# Altium PCB touch switch led controller.PcbDoc
Units mil, origin at the board's own origin, x right, y up, seen from the top; angles counter-clockwise.
Board outline 4448.82 x 2480.32 mil, 2 copper layers (Top Layer, Bottom Layer); 48 components, 37 nets, 171 pads, 38 vias.
Unrouted connection lines stored in the file: 51.
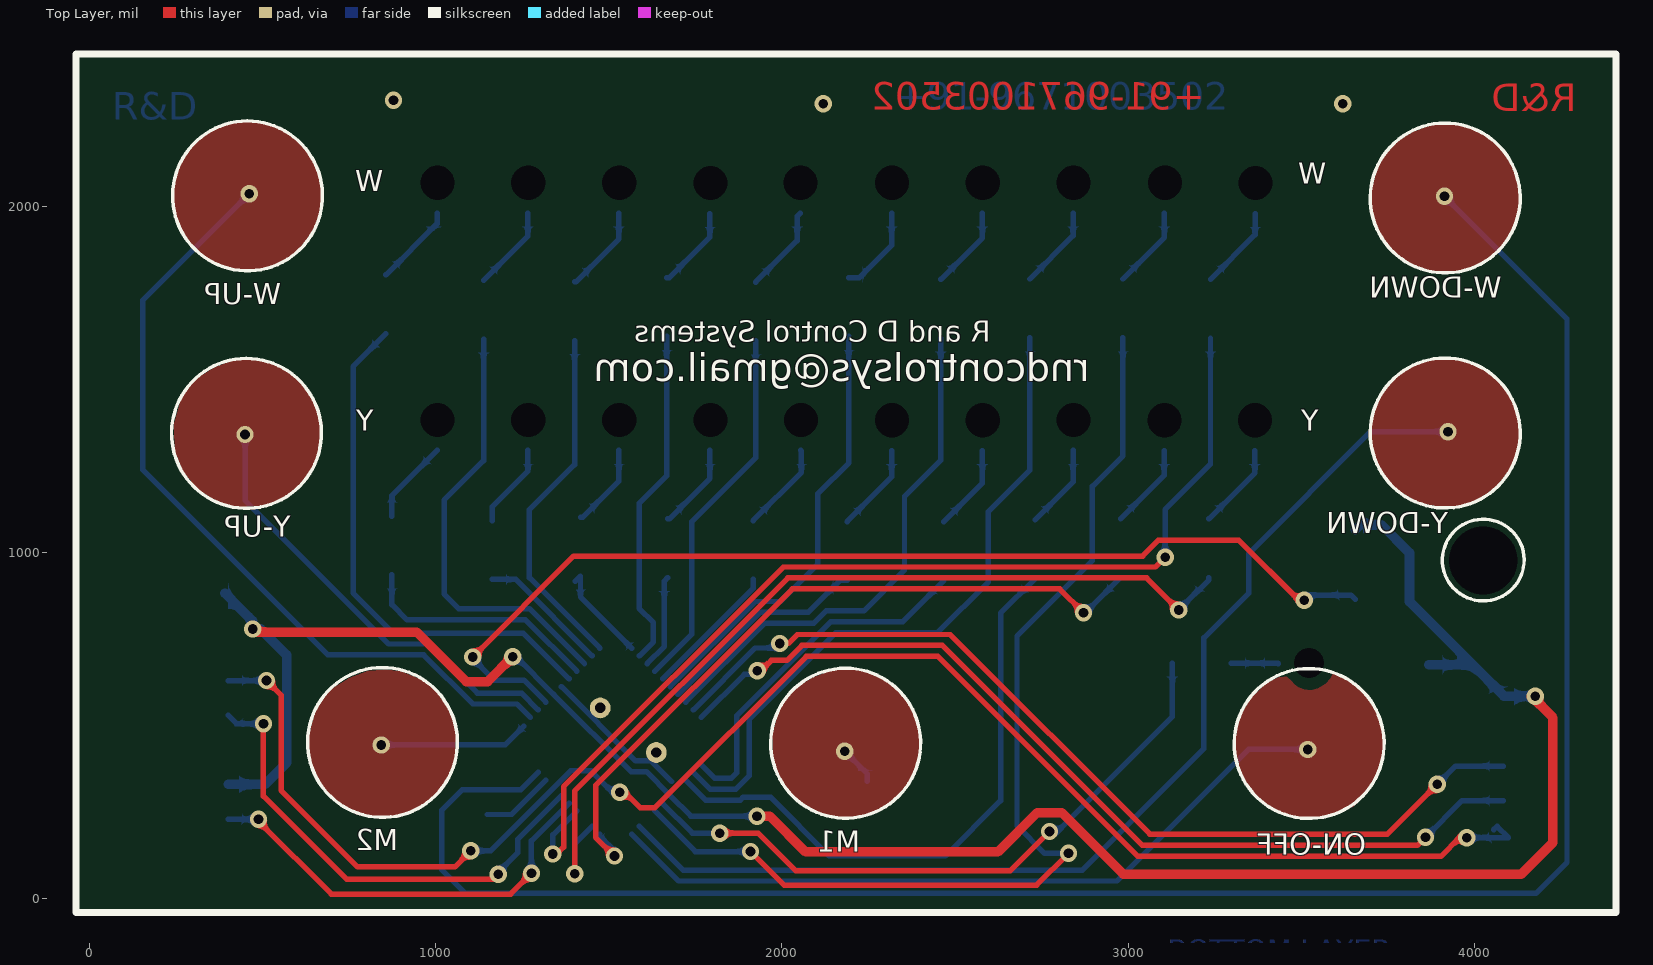
[diagram p0: Top Layer view]
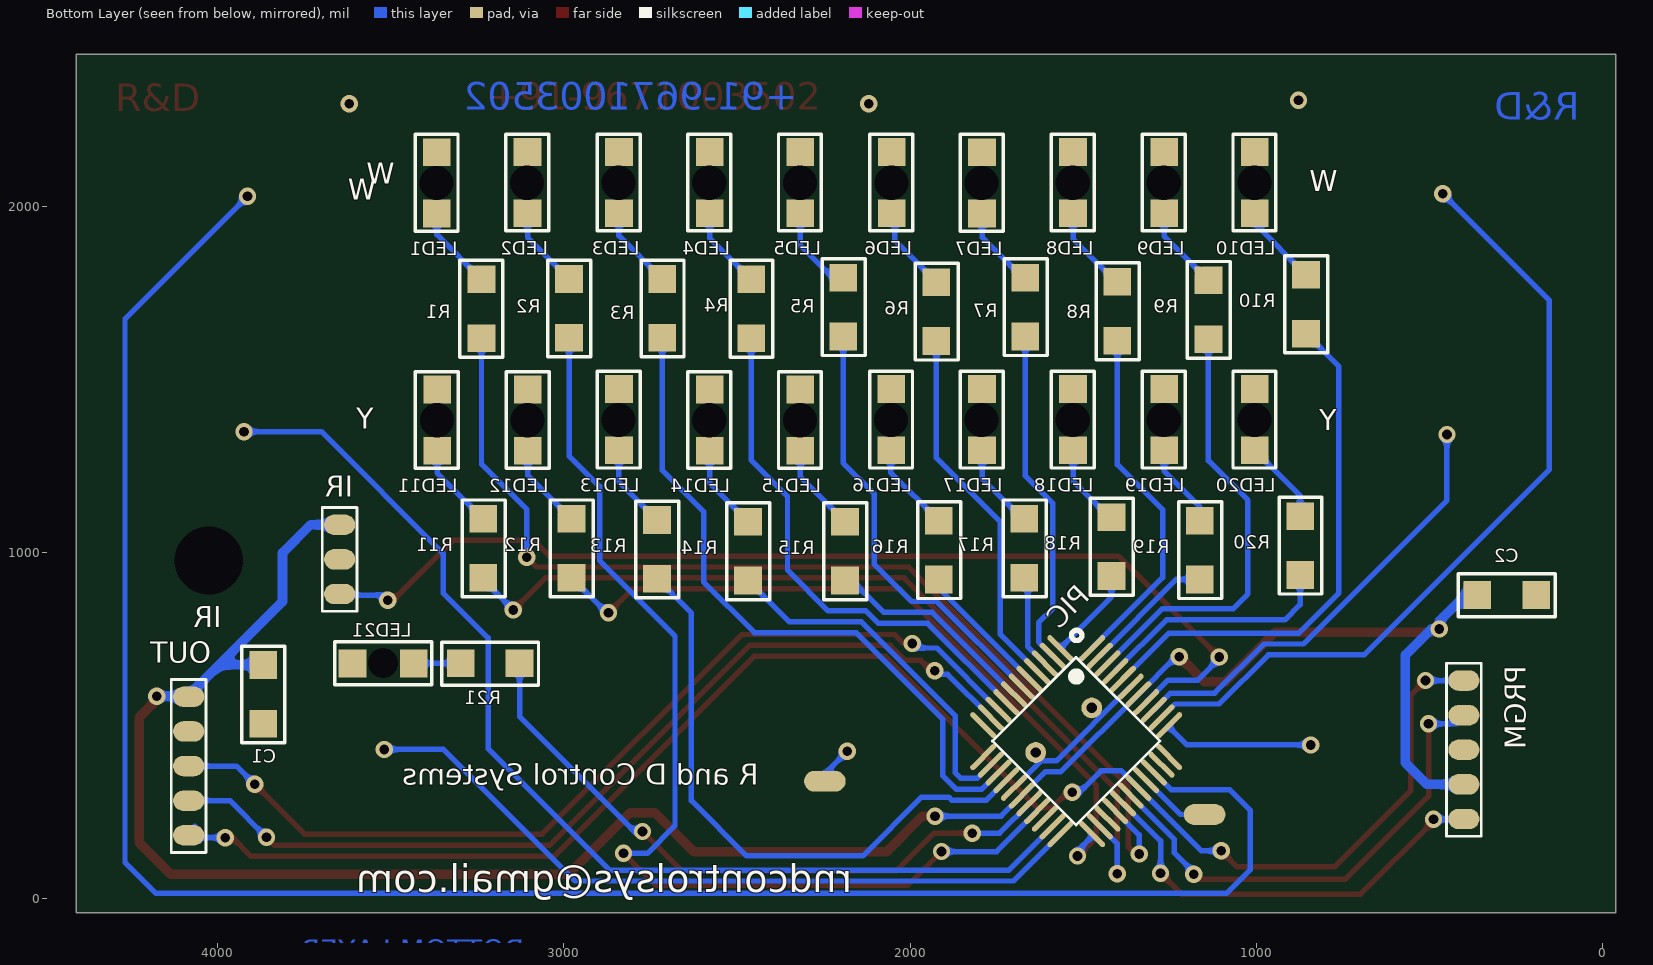
[diagram p1: Bottom Layer view, seen from below]

## Layer stack, top to bottom
Top Solder: solder mask 0.4, Solder Resist, Dk 3.5
Top Layer: signal copper 1.4
Dielectric 1: dielectric 12.6, FR-4, Dk 4.8
Bottom Layer: signal copper 1.4
Bottom Solder: solder mask 0.4, Solder Resist, Dk 3.5

## Board outline
-39.37,-39.37 -39.37,2440.94 4409.45,2440.94 4409.45,-39.37

## Design rules (kind name [scope] priority, off if disabled: settings)
AssemblyTestPointUsage [All] p1 off:
AssemblyTestpoint [All] p1 off: testpointundercomponent=TRUE minsize=40 maxsize=100 preferedsize=60 minholesize=0 maxholesize=40 preferedholesize=32 testpointgrid=1 usegrid=TRUE gridtolerance=0.01 allowsidetop=TRUE allowsidebottom=TRUE
Clearance [All] p1: gap=15.75 ignorepadtopadclearanceinfootprint=FALSE except(0: Arc-Hole Track-Hole SMDPad-THPad SMDPad-Hole THPad-Hole Via-Hole Fill-Hole Poly-Hole Region-Hole Text-Hole; 27.56: Arc-Poly Arc-Region Track-Poly Track-Region SMDPad-Poly SMDPad-Region THPad-Poly THPad-Region Via-Poly Via-Region Fill-Poly Fill-Region Poly-Poly Poly-Region Poly-Text Region-Region Region-Text)
DiffPairsRouting [All] p1 off: maxlimit=10 minlimit=10 mostfreqgap=10 toplayer_minwidth=15 toplayer_maxwidth=15 toplayer_prefwidth=15 bottomlayer_minwidth=15 bottomlayer_maxwidth=15 bottomlayer_prefwidth=15 maxuncoupledlength=500
FabricationTestPointUsage [All] p1 off: valid=0 allowmultiple=FALSE
FabricationTestpoint [All] p1 off: side=3 testpointundercomponent=TRUE minsize=40 maxsize=100 preferedsize=60 minholesize=0 maxholesize=40 preferedholesize=32 testpointgrid=1 allowsidetop=TRUE allowsidebottom=TRUE usegrid=TRUE gridtolerance=0.01
FanoutControl Fanout_BGA [IsBGA] p1 off: bgadir=Out bgaviamode=Centered fanoutstyle=Auto fanoutdirection=Alternating viagrid=1 // Fanout_BGA (Default Rule)
FanoutControl Fanout_LCC [IsLCC] p2 off: bgadir=Out bgaviamode=Centered fanoutstyle=Auto fanoutdirection=Alternating viagrid=1 // Fanout_LCC (Default Rule)
FanoutControl Fanout_SOIC [IsSOIC] p3 off: bgadir=Out bgaviamode=Centered fanoutstyle=Auto fanoutdirection=Alternating viagrid=1 // Fanout_SOIC (Default Rule)
FanoutControl Fanout_Small [(CompPinCount < 5)] p4 off: bgadir=Out bgaviamode=Centered fanoutstyle=Auto fanoutdirection=OutThenIn viagrid=1 // Fanout_Small (Default Rule)
FanoutControl Fanout_Default [All] p5 off: bgadir=Out bgaviamode=Centered fanoutstyle=Auto fanoutdirection=Alternating viagrid=1 // Fanout_Default (Default Rule)
Height [All] p1 off: minheight=0 maxheight=1000 prefheight=500
HoleToHoleClearance [All] p1 off: gap=10 allowstackedmicrovias=TRUE
LayerPairs [All] p1 off: enforce=TRUE
MinimumSolderMaskSliver [All] p1 off: minsoldermaskwidth=10
NetAntennae [All] p1 off: netantennaetolerance=0
PasteMaskExpansion [All] p1 off: expansion=0
PlaneClearance [All] p1 off: clearance=20
PlaneConnect [All] p1 off: planeconnectstyle=Relief reliefexpansion=20 reliefentries=4 reliefconductorwidth=10 reliefairgap=10
PolygonConnect [All] p1: connectstyle=Relief reliefconductorwidth=15.75 reliefentries=4 polygonreliefangle="90 Angle" airgapwidth=12
RoutingLayers [All] p1 off: top layer_v5=TRUE bottom layer_v5=TRUE
RoutingPriority [All] p1 off: routingpriority=0
RoutingTopology [All] p1 off: topology=Shortest
RoutingVias [All] p1: holewidth=28 width=50 viastyle="Through Hole" minholewidth=28 minwidth=50 maxholewidth=28 maxwidth=50
SilkToBoardRegionClearance [All] p1 off:
SilkToSilkClearance [All] p1 off: silktosilkclearance=10
SilkToSolderMaskClearance [IsPad] p1 off: minsilkscreentomaskgap=10 clearancetoexposedcopper=TRUE
SolderMaskExpansion [All] p1 off: expansion=4
UnpouredPolygon [All] p1 off:
Width [All] p1: maxlimit=59.06 minlimit=15.75 preferedwidth=27.56
5 further rules are at their usual default settings.

## Components (designator, comment, footprint, x,y, rotation, side; value= is the part's Value field where it differs from the comment)
C1 "RES1" 1206-RF1#1 3869,506 r90 bottom
C2 "RES1" 1206-RF1#1 361,878 r180 bottom
IR "Comment" HDR1X3 3648,881 r90 bottom
LED1 "WL-SMCW" 1206-RF1#2 3367,1984 r90 bottom locked
LED2 "WL-SMCW" 1206-RF1#2 3105,1985 r90 bottom locked
LED3 "WL-SMCW" 1206-RF1#2 2841,1985 r90 bottom locked
LED4 "WL-SMCW" 1206-RF1#2 2579,1985 r90 bottom locked
LED5 "WL-SMCW" 1206-RF1#2 2317,1985 r90 bottom locked
LED6 "WL-SMCW" 1206-RF1#2 2053,1985 r90 bottom locked
LED7 "WL-SMCW" 1206-RF1#2 1792,1984 r90 bottom locked
LED8 "WL-SMCW" 1206-RF1#2 1529,1985 r90 bottom locked
LED9 "WL-SMCW" 1206-RF1#2 1266,1985 r90 bottom locked
LED10 "WL-SMCW" 1206-RF1#2 1004,1985 r90 bottom locked
LED11 "WL-SMCW" 1206-RF1#2 3366,1299 r90 bottom locked
LED12 "WL-SMCW" 1206-RF1#2 3104,1299 r90 bottom locked
LED13 "WL-SMCW" 1206-RF1#2 2841,1300 r90 bottom locked
LED14 "WL-SMCW" 1206-RF1#2 2579,1299 r90 bottom locked
LED15 "WL-SMCW" 1206-RF1#2 2317,1299 r90 bottom locked
LED16 "WL-SMCW" 1206-RF1#2 2054,1300 r90 bottom locked
LED17 "WL-SMCW" 1206-RF1#2 1792,1300 r90 bottom locked
LED18 "WL-SMCW" 1206-RF1#2 1529,1300 r90 bottom locked
LED19 "WL-SMCW" 1206-RF1#2 1266,1300 r90 bottom locked
LED20 "WL-SMCW" 1206-RF1#2 1004,1300 r90 bottom locked
LED21 "WL-SMCW" 1206-RF1#2 3607,680 r180 bottom
OUT "Comment" HDR1X5 4084,584 r270 bottom
PIC "Comment" 44A_N 1520,456 r315 bottom
PRGM "Comment" HDR1X5 400,231 r90 bottom
R1 "RES1" 1206-RF1#1 3238,1790 r270 bottom
R2 "RES1" 1206-RF1#1 2985,1621 r90 bottom
R3 "RES1" 1206-RF1#1 2716,1621 r90 bottom
R4 "RES1" 1206-RF1#1 2459,1620 r90 bottom
R5 "RES1" 1206-RF1#1 2193,1625 r90 bottom
R6 "RES1" 1206-RF1#1 1924,1612 r90 bottom
R7 "RES1" 1206-RF1#1 1667,1625 r90 bottom
R8 "RES1" 1206-RF1#1 1401,1613 r90 bottom
R9 "RES1" 1206-RF1#1 1138,1617 r90 bottom
R10 "RES1" 1206-RF1#1 856,1633 r90 bottom
R11 "RES1" 1206-RF1#1 3233,928 r90 bottom
R12 "RES1" 1206-RF1#1 2978,928 r90 bottom
R13 "RES1" 1206-RF1#1 2731,925 r90 bottom
R14 "RES1" 1206-RF1#1 2468,920 r90 bottom
R15 "RES1" 1206-RF1#1 2188,920 r90 bottom
R16 "RES1" 1206-RF1#1 1917,923 r90 bottom
R17 "RES1" 1206-RF1#1 1670,928 r90 bottom
R18 "RES1" 1206-RF1#1 1418,933 r90 bottom
R19 "RES1" 1206-RF1#1 1163,923 r90 bottom
R20 "RES1" 1206-RF1#1 873,936 r90 bottom
R21 "RES1" 1206-RF1#1 3298,681 r180 bottom

## Footprints (in the part's own frame and the unit in brackets; to place one, negate y for a bottom-side part, rotate by r counter-clockwise, add the part's x,y. Pads: shape width x height; smd on the part's side, far side on the other; paste and mask are expansions set on the pad)
44A_N [mm] "Thin QFP, 44-Leads, Body 10x10mm, Pitch 0.8mm, IPC Medium Density"
  oval 2.54x0.4 smd: 1(-5.65,-4) 2(-5.65,-3.2) 3(-5.65,-2.4) 4(-5.65,-1.6) 5(-5.65,-0.8) 6(-5.65,0) 7(-5.65,0.8) 8(-5.65,1.6) 9(-5.65,2.4) 10(-5.65,3.2) 11(-5.65,4) 23(5.65,4) 24(5.65,3.2) 25(5.65,2.4) 26(5.65,1.6) 27(5.65,0.8) 28(5.65,0) 29(5.65,-0.8) 30(5.65,-1.6) 31(5.65,-2.4) 32(5.65,-3.2) 33(5.65,-4)
  oval 0.4x2.54 smd: 12(-4,5.65) 13(-3.2,5.65) 14(-2.4,5.65) 15(-1.6,5.65) 16(-0.8,5.65) 17(0,5.65) 18(0.8,5.65) 19(1.6,5.65) 20(2.4,5.65) 21(3.2,5.65) 22(4,5.65) 34(4,-5.65) 35(3.2,-5.65) 36(2.4,-5.65) 37(1.6,-5.65) 38(0.8,-5.65) 39(0,-5.65) 40(-0.8,-5.65) 41(-1.6,-5.65) 42(-2.4,-5.65) 43(-3.2,-5.65) 44(-4,-5.65)
  silkscreen extent -5.89,-5.84 4.35,4.35
1206-RF1#1 [mil]
  rect 80x80 smd: 1(0,0) 2(170,0)
  silkscreen extent -55,-63 225,61
1206-RF1#2 [mil]
  rect 80x80 smd: 1(-4,0) 2(173,0)
  silkscreen extent -55,-61 225,63
HDR1X3 [mil] "Connector; Header; 3 Position"
  oval 59.06x90 smd: 1(0,0) 2(100,0) 3(200,0)
  silkscreen extent -50,-50 250,50
HDR1X5 [mil] "Connector; Header; 5 Position"
  oval 59.06x90 smd: 1(0,0) 2(100,0) 3(200,0) 4(300,0) 5(400,0)
  silkscreen extent -50,-50 450,50

## Free pads (board coordinates)
  round 0 hole 98.43 unplated: 7(1005,1384) 7(1005,2069) 7(1267,1384) 7(1267,2069) 7(1530,1384) 7(1530,2069) 7(1793,1384) 7(1793,2068) 7(2054,2069) 7(2055,1384) 7(2318,1383) 7(2318,2069) 7(2580,1383) 7(2580,2069) 7(2842,1384) 7(2842,2069) 7(3105,1383) 7(3106,2069) 7(3367,1383) 7(3368,2068)
  round 0 hole 86.61 unplated: 7(3523,681)
  round 0 hole 196.85 unplated: 8(4026,978)
  round 60 hole 30: 9(1637,423) 10(1475,552)
  oval 120x60 smd far side: 11(1149,244) 11(2246,340)

## Via types
v1: diameter 50, hole 28, Top Layer to Bottom Layer, 38 vias

## Nets (pads, with @x,y where several pads share a name; then routed paths per layer and width w, separated by ;. In a path a pad name is that pad's centre, name@x,y a point inside that pad or via, vN(x,y) a via of type N, cw(c..) or ccw(c..) an arc to the next point about the centre after c; other vN are vias at no path point)
BUZZER: OUT.5 PIC.16 PRGM.5 | length 4745.2
  Top Layer w15.75: v1(511,631) 553,589 553,314 774,93 1055,93 v1(1101,139) ; v1(1531,308) 1546,308 1590,264 1633.3,264 2070.3,701 2450.46,701 3028.46,123 3904,123 3958,177 v1(3978,177)
  Bottom Layer w15.75: PRGM.5 v1(511,631) ; v1(1101,139) 1158.46,139 PIC.16 1389.46,370 1449,370 1511,308 v1(1531,308) ; v1(3978,177) 4099,177 4066,210 OUT.5@4056,200
CLK: 
DATA: PIC.17 PRGM.4 | length 1408
  Top Layer w15.75: v1(502,506) 502,297 742,57 1166,57 v1(1180,71)
  Bottom Layer w15.75: PRGM.4 425,506 v1(502,506) ; v1(1180,71) 1180,77 1237,134 1237,173 PIC.17
GND: C1.1 C2.2 IR.2 LED1.2 LED2.2 LED3.2 LED4.2 LED5.2 LED6.2 LED7.2 LED8.2 LED9.2 LED10.2 LED11.2 LED12.2 LED13.2 LED14.2 LED15.2 LED16.2 LED17.2 LED18.2 LED19.2 LED20.2 LED21.1 OUT.2 pad.9 pad.10 PIC.6 PIC.29 PRGM.3 | length 432.1
  Bottom Layer w15.75: PIC.6 1577,399 1621.54,399 1660.55,359.99 PIC.29@1681.27,339.27
  other v1: 2119,2297 3620,2297 878,2307
IR: IR.1 PIC.8 | length 3039.2
  Top Layer w15.75: v1(1107,699) 1398.49,990.49 3041.73,990.49 3086.86,1035.62 3320.38,1035.62 3493,863 v1(3509,863)
  Bottom Layer w15.75: v1(1107,699) 1107,693.92 1168.46,632.46 1254.46,632.46 PIC.8 ; v1(3509,863) 3524,878 3644,878 IR.1@3656,866
LED1W1: LED1.1 PIC.19 R1.1 R1.2 | length 3316.1
  Top Layer w15.75: v1(1338,130) 1350,130 1369.5,149.5 1369.5,324.59 2003.91,958.99 3078.99,958.99 v1(3107,987)
  Bottom Layer w15.75: v1(1338,130) 1338,184.92 PIC.19 ; v1@3113,987 v1(3107,987) 3107,1125 3238,1256 R1.2 ; R1.1 3367,1919 LED1.1
LED2W2: LED2.1 PIC.26 R2.1 R2.2 | length 3283.7
  Top Layer w15.75: v1(1909,137) 2006,40 2736,40 v1(2828,132)
  Bottom Layer w15.75: PIC.26 1749.92,137 v1(1909,137) ; v1@2828,128 v1(2828,132) 2759,132 2679,212 2679,759.59 2897,977.59 2897,1192 2985,1280 R2.1 ; R2.2 3105,1911 LED2.1
LED3W3: LED3.1 PIC.31 R3.1 R3.2 | length 2212.2
  Bottom Layer w15.75: PIC.31 1792.34,317.29 1866.9,317.29 1905.61,356 1905.61,519.61 2155.5,769.5 2449.5,769.5 2596,916 2596,1119 2716,1239 R3.1 ; R3.2 2841,1916 LED3.1
LED4W4: LED4.1 PIC.37 R4.1 R4.2 | length 1744.3
  Bottom Layer w15.75: PIC.37 1949.47,796.39 2091.84,796.39 2127.95,832.5 2236.5,832.5 2354,950 2354,1163 2459,1268 R4.1 ; R4.2 2579,1910 LED4.1
LED5W5: LED5.1 PIC.39 R5.1 R5.2 | length 1523
  Bottom Layer w15.75: PIC.39 1923.38,859.38 1995.38,859.38 2104,968 2104,1171 2193,1260 R5.1 ; R5.2 2224,1795 2317,1888 LED5.1
LED6W6: LED6.1 PIC.41 R6.1 R6.2 | length 1327.2
  Bottom Layer w15.75: PIC.41 1740,765.08 1740,1090 1924,1274 R6.1 ; R6.2 2044,1902 2044,1972 LED6.1
LED7W7: LED7.1 PIC.43 R7.1 R7.2 | length 1230.8
  Bottom Layer w15.75: PIC.43 1628.5,742.67 1628.5,798.5 1587.38,839.62 1587.38,1142.62 1667,1222.24 R7.1 ; R7.2 1675,1795 1792,1912 LED7.1
LED8W8: LED8.1 PIC.1 R8.1 R8.2 | length 1280
  Bottom Layer w15.75: R8.1 1401,1255 1270.56,1124.56 1270.56,928.15 PIC.1 ; R8.2 1405,1783 1529,1907 LED8.1
LED9W9: LED9.1 PIC.3 R9.1 R9.2 | length 1519
  Bottom Layer w15.75: R9.1 1138,1266 1024,1152 1024,881 1066,839 1270.63,839 PIC.3 ; R9.2 1266,1915 LED9.1
LED10W10: LED10.1 PIC.5 R10.1 R10.2 | length 1754.5
  Bottom Layer w15.75: R10.1 761,1538 761,884 877,768 1252.54,768 PIC.5 ; R10.2 1004,1951 LED10.1
LED11Y1: LED11.1 PIC.21 R11.1 R11.2 | length 2815.8
  Top Layer w15.75: v1(1401,73) 1401,311.54 2016.95,927.5 3053.5,927.5 v1(3146,835)
  Bottom Layer w15.75: v1(1401,73) 1401,158.83 PIC.21 ; v1(3146,835) 3233,922 R11.1 ; R11.2 3366,1231 LED11.1
LED12Y2: LED12.1 PIC.22 R12.1 R12.2 | length 2389.8
  Top Layer w15.75: v1(1516,124) 1462,178 1462,328 2030,896 2802,896 v1(2871,827)
  Bottom Layer w15.75: PIC.22 1474.07,180.93 1520,135 1523,135 v1@1516,128 ; v1@1513,125 v1@1516,128 ; v1(1516,124) v1@1516,128 ; v1(2871,827) 2877,827 R12.1 ; R12.2 3104,1224 LED12.1
LED13Y3: LED13.1 PIC.30 R13.1 R13.2 | length 2002.3
  Bottom Layer w15.75: PIC.30 1779.29,285.79 1879.94,285.79 1888.15,294 1967,294 2136.62,124.38 2472.38,124.38 2632,284 2632,826 R13.1 ; R13.2 2841,1205 LED13.1
LED14Y4: LED14.1 PIC.32 R14.1 R14.2 | length 1302.1
  Bottom Layer w15.75: PIC.32 1805.39,348.78 1853.85,348.78 1870,364.93 1870,530 2141,801 2349,801 R14.1 ; R14.2 2579,1201 LED14.1
LED15Y5: LED15.1 PIC.38 R15.1 R15.2 | length 883.1
  Bottom Layer w15.75: PIC.38 1936.42,827.88 2075.88,827.88 2168,920 R15.1 ; R15.2 2317,1219 LED15.1
LED16Y6: LED16.1 PIC.40 R16.1 R16.2 | length 657.4
  Bottom Layer w15.75: PIC.40 1917,897.54 R16.1 ; R16.2 2056,1232 2056,1294 LED16.1
LED17Y7: LED17.1 PIC.42 R17.1 R17.2 | length 524
  Bottom Layer w15.75: PIC.42 1660,729.63 1660,918 R17.1 ; R17.2 1675,1098 1792,1215 LED17.1
LED18Y8: LED18.1 PIC.44 R18.1 R18.2 | length 534.6
  Bottom Layer w15.75: R18.1@1402.52,917.52 R18.1 1418,872.58 PIC.44 ; R18.2 1425,1103 1529,1207 LED18.1
LED19Y9: LED19.1 PIC.2 R19.1 R19.2 | length 625.8
  Bottom Layer w15.75: R19.1 1231.17,923 PIC.2 ; R19.2 1163,1133 1266,1236 LED19.1
LED20Y10: LED20.1 PIC.4 R20.1 R20.2 | length 944.1
  Bottom Layer w15.75: R20.1 873,850 917,806 1259.08,806 PIC.4 ; R20.2 873,1165 LED20.1
LED21POWER: LED21.2 PIC.27 R21.1 R21.2 | length 2033.2
  Top Layer w15.75: v1(1820,190) 1931,190 2040,81 2659,81 v1(2773,195)
  Bottom Layer w15.75: PIC.27 1741.46,190 v1(1820,190) ; v1(2773,195) 2786,195 2791,190 3128,527 R21.2 ; R21.1 3433,681 LED21.2
M1: pad.11 PIC.15 | length 342.2
  Bottom Layer w15.75: pad.11@1149,244 1218.92,244 PIC.15 ; v1@2181,409 v1(2181,427) 2246,362 pad.11@2246,340
M2: PIC.11 | length 434.6
  Bottom Layer w15.75: v1(842,445) 1200,445 PIC.11@1254.14,499.14
MCLR: PIC.18 PRGM.1 | length 1241.8
  Top Layer w15.75: v1(488,230) 488,224 698,14 1216,14 v1(1276.38,74.38)
  Bottom Layer w15.75: PRGM.1 401,230 v1(488,230) ; v1(1276.38,74.38) 1276.38,167.84 PIC.18
ONOFF: PIC.23 | length 2166.6
  Bottom Layer w15.75: PIC.23 1701.41,51.88 2967.88,51.88 3348,432 v1(3519,432)
VCC: C1.2 C2.1 IR.3 OUT.1 PIC.7 PIC.28 PRGM.2 | length 6398.3
  Top Layer w27.56: v1@471,771 945,771 1088,628 1150,628 v1(1222,700) ; v1(1928,239) 1965.11,239 2068.11,136 2624,136 2737.53,249.53 2808.47,249.53 2986,72 4136,72 4227,163 4227,524 v1@4165,586
  Bottom Layer w15.75: v1(1222,700) 1231.46,700 PIC.7 1563.95,367.5 1608.5,367.5 PIC.28 1737,239 v1(1928,239)
  Bottom Layer w27.56: C2.1@391,883 471,803 v1(471,780) 494,780 569,705 569,393 507,331 PRGM.2 ; IR.3@3656,1066 3671,1081 3732,1081 3813,1000 3813,859 3996,676 ; C1.2 3996,676 ; v1(4176,586) 4086,586 3996,676
WDOWN: PIC.14 | length 5882.8
  Bottom Layer w15.75: PIC.14 1245.37,315 1076,315 1017,256 1017,85 1086,16 4178,16 4268,106 4268,1676 v1(3914,2030)
WPWM: OUT.4 PIC.35 | length 2683.4
  Top Layer w15.75: v1(1929,659) 1939,659 1969.38,689.38 2014.14,689.38 2057.26,732.5 2463.5,732.5 3041,155 3836,155 v1(3859,178)
  Bottom Layer w15.75: PIC.35 1891.17,649 v1@1920,649 ; v1(3859,178) 3965,284 OUT.4
WUP: PIC.10 | length 2341.7
  Bottom Layer w15.75: v1(461,2037) 153,1729 153,1240 687.99,705.01 964.99,705.01 1106.78,563.22 1234.61,563.22 PIC.10
YDOWN: PIC.24 | length 3166.8
  Bottom Layer w15.75: PIC.24 1714.45,83.38 2868.14,83.38 3219,434.24 3219,754 3348,883 3348,997 3701,1350 v1(3924,1350)
YPWM: OUT.3 PIC.36 | length 2730.2
  Top Layer w15.75: v1(1994,738) 2018.22,738 2044.21,763.99 2486.01,763.99 3063,187 3749,187 v1(3893,331)
  Bottom Layer w15.75: PIC.36 1922.63,725 v1@1979,725 ; v1(3893,331) 3946,384 OUT.3
YUP: PIC.9 | length 1288
  Bottom Layer w15.75: v1(449,1342) 449,1151.46 863.95,736.5 978.04,736.5 1119.83,594.71 1247.66,594.71 PIC.9
pads on no net: PIC.12 PIC.13 PIC.20 PIC.25 PIC.33 PIC.34

## Polygon pours and split planes (outlines as drawn)
YDOWN on Top Layer "YDOWN_L01_P014" (solid, pour order 14): 3919,1562.5 3875,1559.5 3821,1539.5 3765,1504.5 3725,1450.5 3703,1371.5 3707,1294.5 3730,1237.5 3776,1183.5 3841,1143.5 3909,1131.5 3964,1136.5 4009,1153.5 4059,1186.5 4106,1245.5 4130,1311.5 4132,1382.5 4106,1448.5 4070,1502.5 4031,1533.5 3969,1558.5 3920,1564.5
WDOWN on Top Layer "WDOWN_L01_P016" (solid, pour order 16): 3919,2238 3875,2235 3821,2215 3765,2180 3725,2126 3703,2047 3707,1970 3730,1913 3776,1859 3841,1819 3909,1807 3964,1812 4009,1829 4059,1862 4106,1921 4130,1987 4132,2058 4106,2124 4070,2178 4031,2209 3969,2234 3920,2240
M2 on Top Layer "M2_L01_P008" (solid, pour order 8): 849,662 805,659 751,639 695,604 655,550 633,471 637,394 660,337 706,283 771,243 839,231 894,236 939,253 989,286 1036,345 1060,411 1062,482 1036,548 1000,602 961,633 899,658 850,664
YUP on Top Layer "YUP_L01_P006" (solid, pour order 6): 459,1559 415,1556 361,1536 305,1501 265,1447 243,1368 247,1291 270,1234 316,1180 381,1140 449,1128 504,1133 549,1150 599,1183 646,1242 670,1308 672,1379 646,1445 610,1499 571,1530 509,1555 460,1561
WUP on Top Layer "WUP_L01_P004" (solid, pour order 4): 458,2246 414,2243 360,2223 304,2188 264,2134 242,2055 246,1978 269,1921 315,1867 380,1827 448,1815 503,1820 548,1837 598,1870 645,1929 669,1995 671,2066 645,2132 609,2186 570,2217 508,2242 459,2248
ONOFF on Top Layer "ONOFF_L01_P018" (solid, pour order 18): 3457,651 3400,623 3353,578 3318,516 3308,439 3324,368 3353,315 3382,284 3432,251 3478,235 3528,230 3592,242 3650,267 3683,299 3717,349 3737,410 3739,466 3727,514 3707,566 3649,627 3598,651 3592,652 3584,636 3571,621 3550,608 3527,603 3507,606 3492,612 3480,620 3464,642 3459,652 3449,648
M1 on Top Layer "M1_L01_P012" (solid, pour order 12): 2188,663.5 2144,660.5 2090,640.5 2034,605.5 1994,551.5 1972,472.5 1976,395.5 1999,338.5 2045,284.5 2110,244.5 2178,232.5 2233,237.5 2278,254.5 2328,287.5 2375,346.5 2399,412.5 2401,483.5 2375,549.5 2339,603.5 2300,634.5 2238,659.5 2189,665.5

## Other copper
Top Layer:
  text "+91-9671003502" at 3221,2280 h80
  text "R&D" at 4296,2275 h80
  text "TOP LAYER" at 3713,-302 h60
Bottom Layer:
  text "+91-9671003502" at 2326,2280 h80
  text "R&D" at 66,2251 h80
  text "BOTTOM LAYER" at 3115,-179 h60

## Silkscreen, mask and mechanical layers (free items; w line width, h text height)
Top Overlay:
  lines w10: 492.95,1132.18 cw(c453,1345) 494.32,1132.44 ; 495.95,1818.18 cw(c456,2031) 497.32,1818.44 ; 885.95,239.18 cw(c846,452) 887.32,239.44 ; 2223.95,237.18 cw(c2184,450) 2225.32,237.44 ; 3562.95,236.18 cw(c3523,449) 3564.32,236.44 ; 3955.95,1133.18 cw(c3916,1346) 3957.32,1133.44 ; 3955.95,1812.18 cw(c3916,2025) 3957.32,1812.44 ; 4047.79,862.92 cw(c4026,979) 4048.54,863.06
  lines w19.68: -39.37,-39.37 4409.45,-39.37 4409.45,2440.94 -39.37,2440.94 -39.37,-39.37
  text "W" at 3492,2066 h60
  text "W" at 767,2045 h60
  text "W-DOWN" at 4080,1737 h60
  text "W-UP" at 553,1718 h60
  text "R and D Control Systems" at 2603,1610 h60
  text "rndcontrolsys@gmail.com" at 2889,1495 h80
  text "Y" at 770,1352 h60
  text "Y" at 3500,1352 h60
  text "Y-DOWN" at 3925,1056 h60
  text "Y-UP" at 581,1046 h60
  text "M2" at 891,141 h60
  text "M1" at 2226,137 h60
  text "ON-OFF" at 3688,128 h60
Bottom Overlay:
  text "W" at 3489,2066 h60
  text "W" at 764,2045 h60
  text "W" at 3542,2020 h60
  text "Y" at 3549,1359 h60
  text "Y" at 767,1354 h60
  text "IR" at 3989,785 h60
  text "R and D Control Systems" at 2437,330 h60
  text "rndcontrolsys@gmail.com" at 2167,19 h80
Mechanical 2:
  lines w19.68: 2824.45,2012.41 2828.01,2011.38 2831.64,2010.57 2835.3,2009.99 2838.99,2009.64 2842.7,2009.52 2846.41,2009.64 2850.1,2009.99 2853.77,2010.57 2857.39,2011.38 2860.95,2012.41